# Altium PCB MineSafe.PcbDoc
Units mil, origin at the board's own origin, x right, y up, seen from the top; angles counter-clockwise.
Board outline 3681.36 x 3681.36 mil, 2 copper layers (Top Layer, Bottom Layer); 32 components, 29 nets, 153 pads, 6 vias.
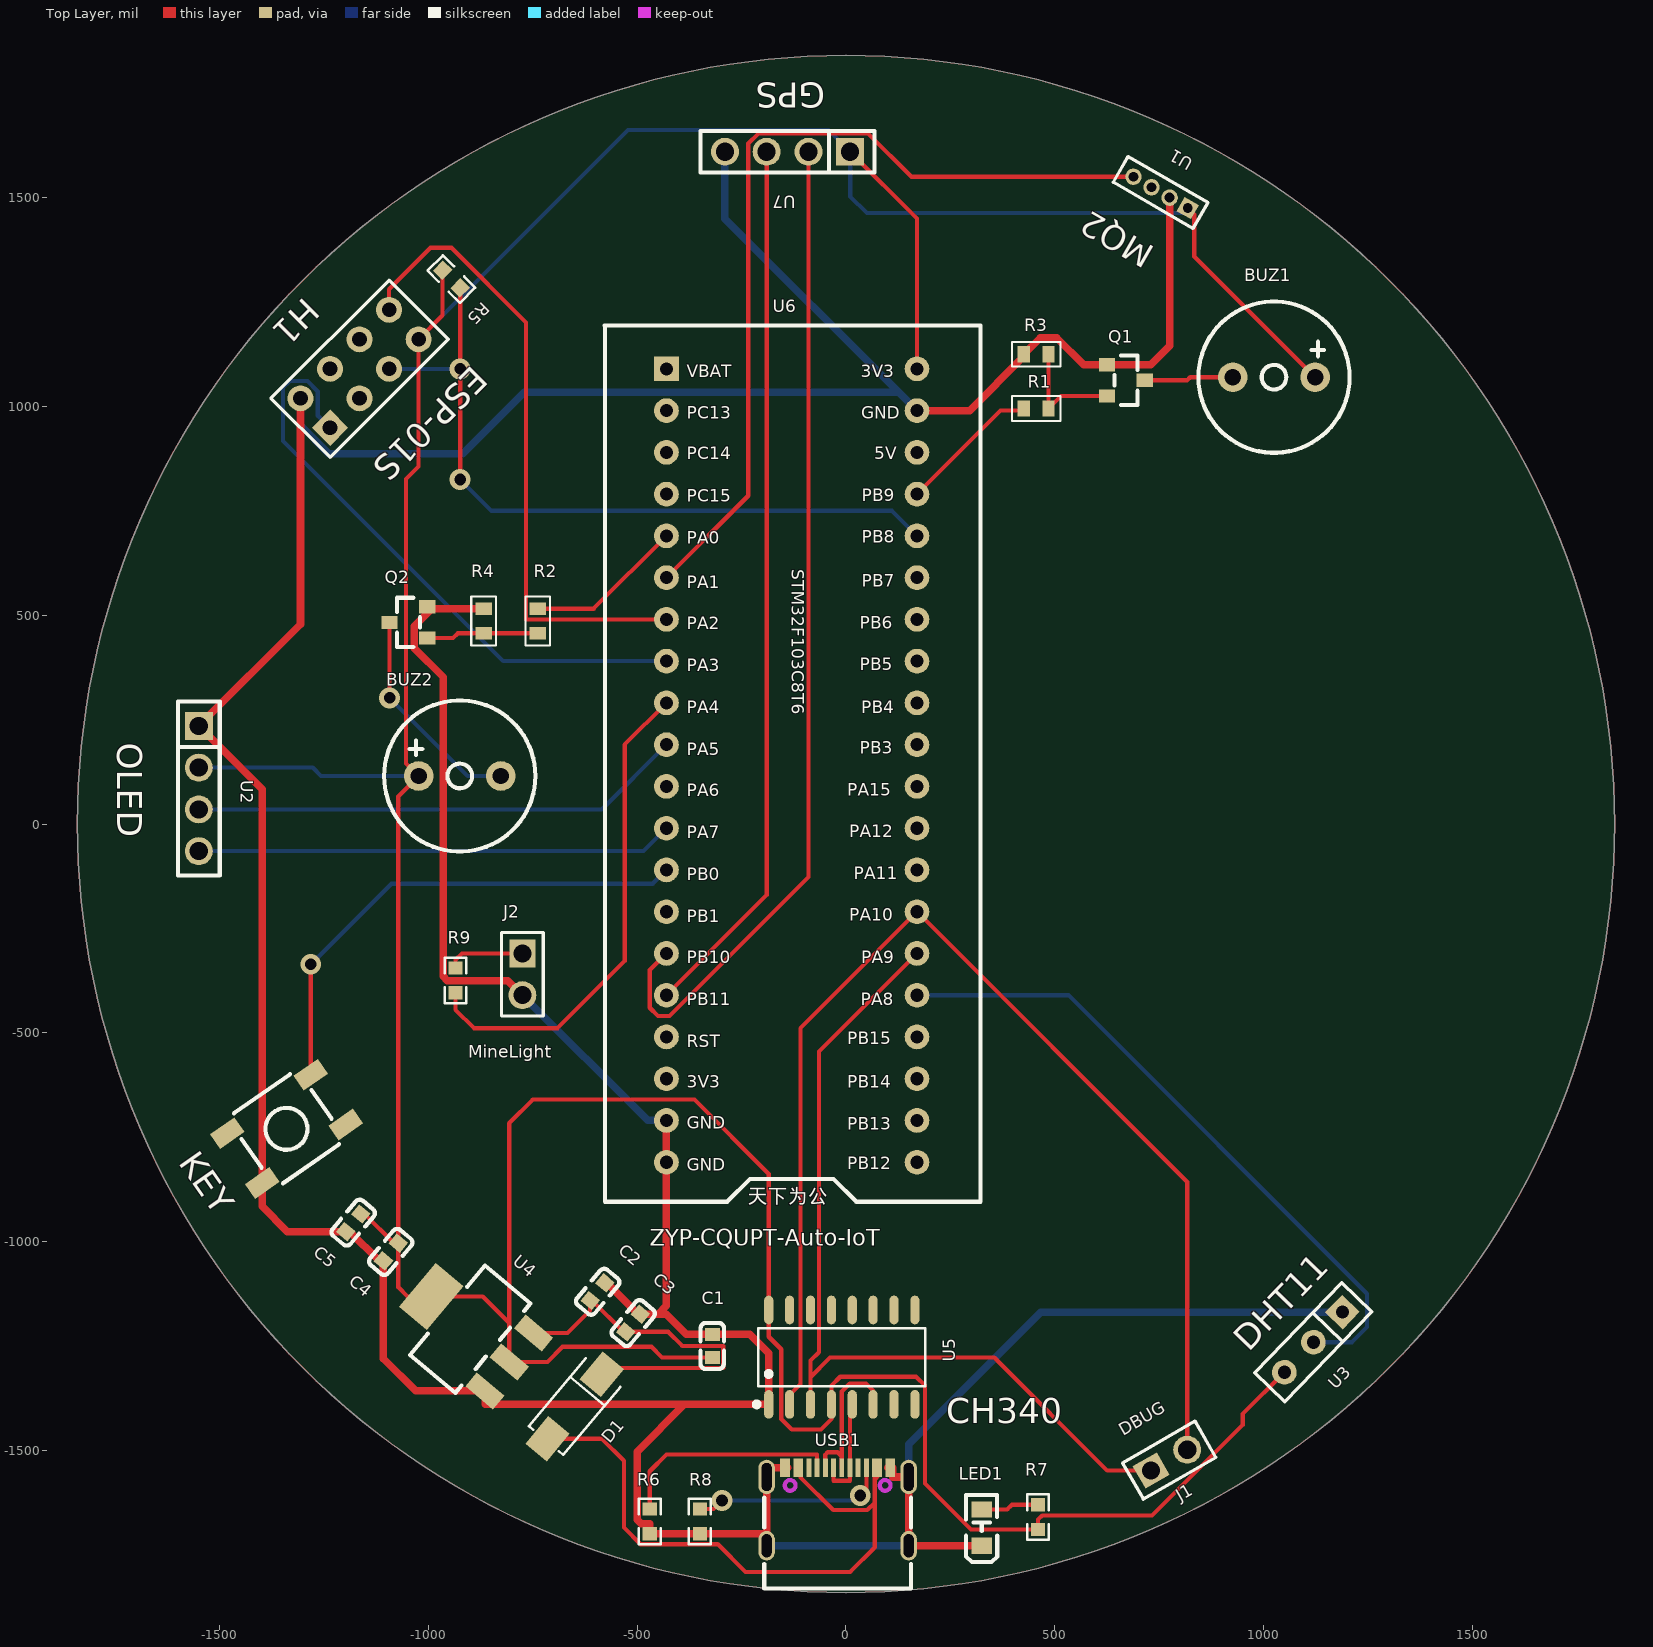
[diagram p0: Top Layer view]
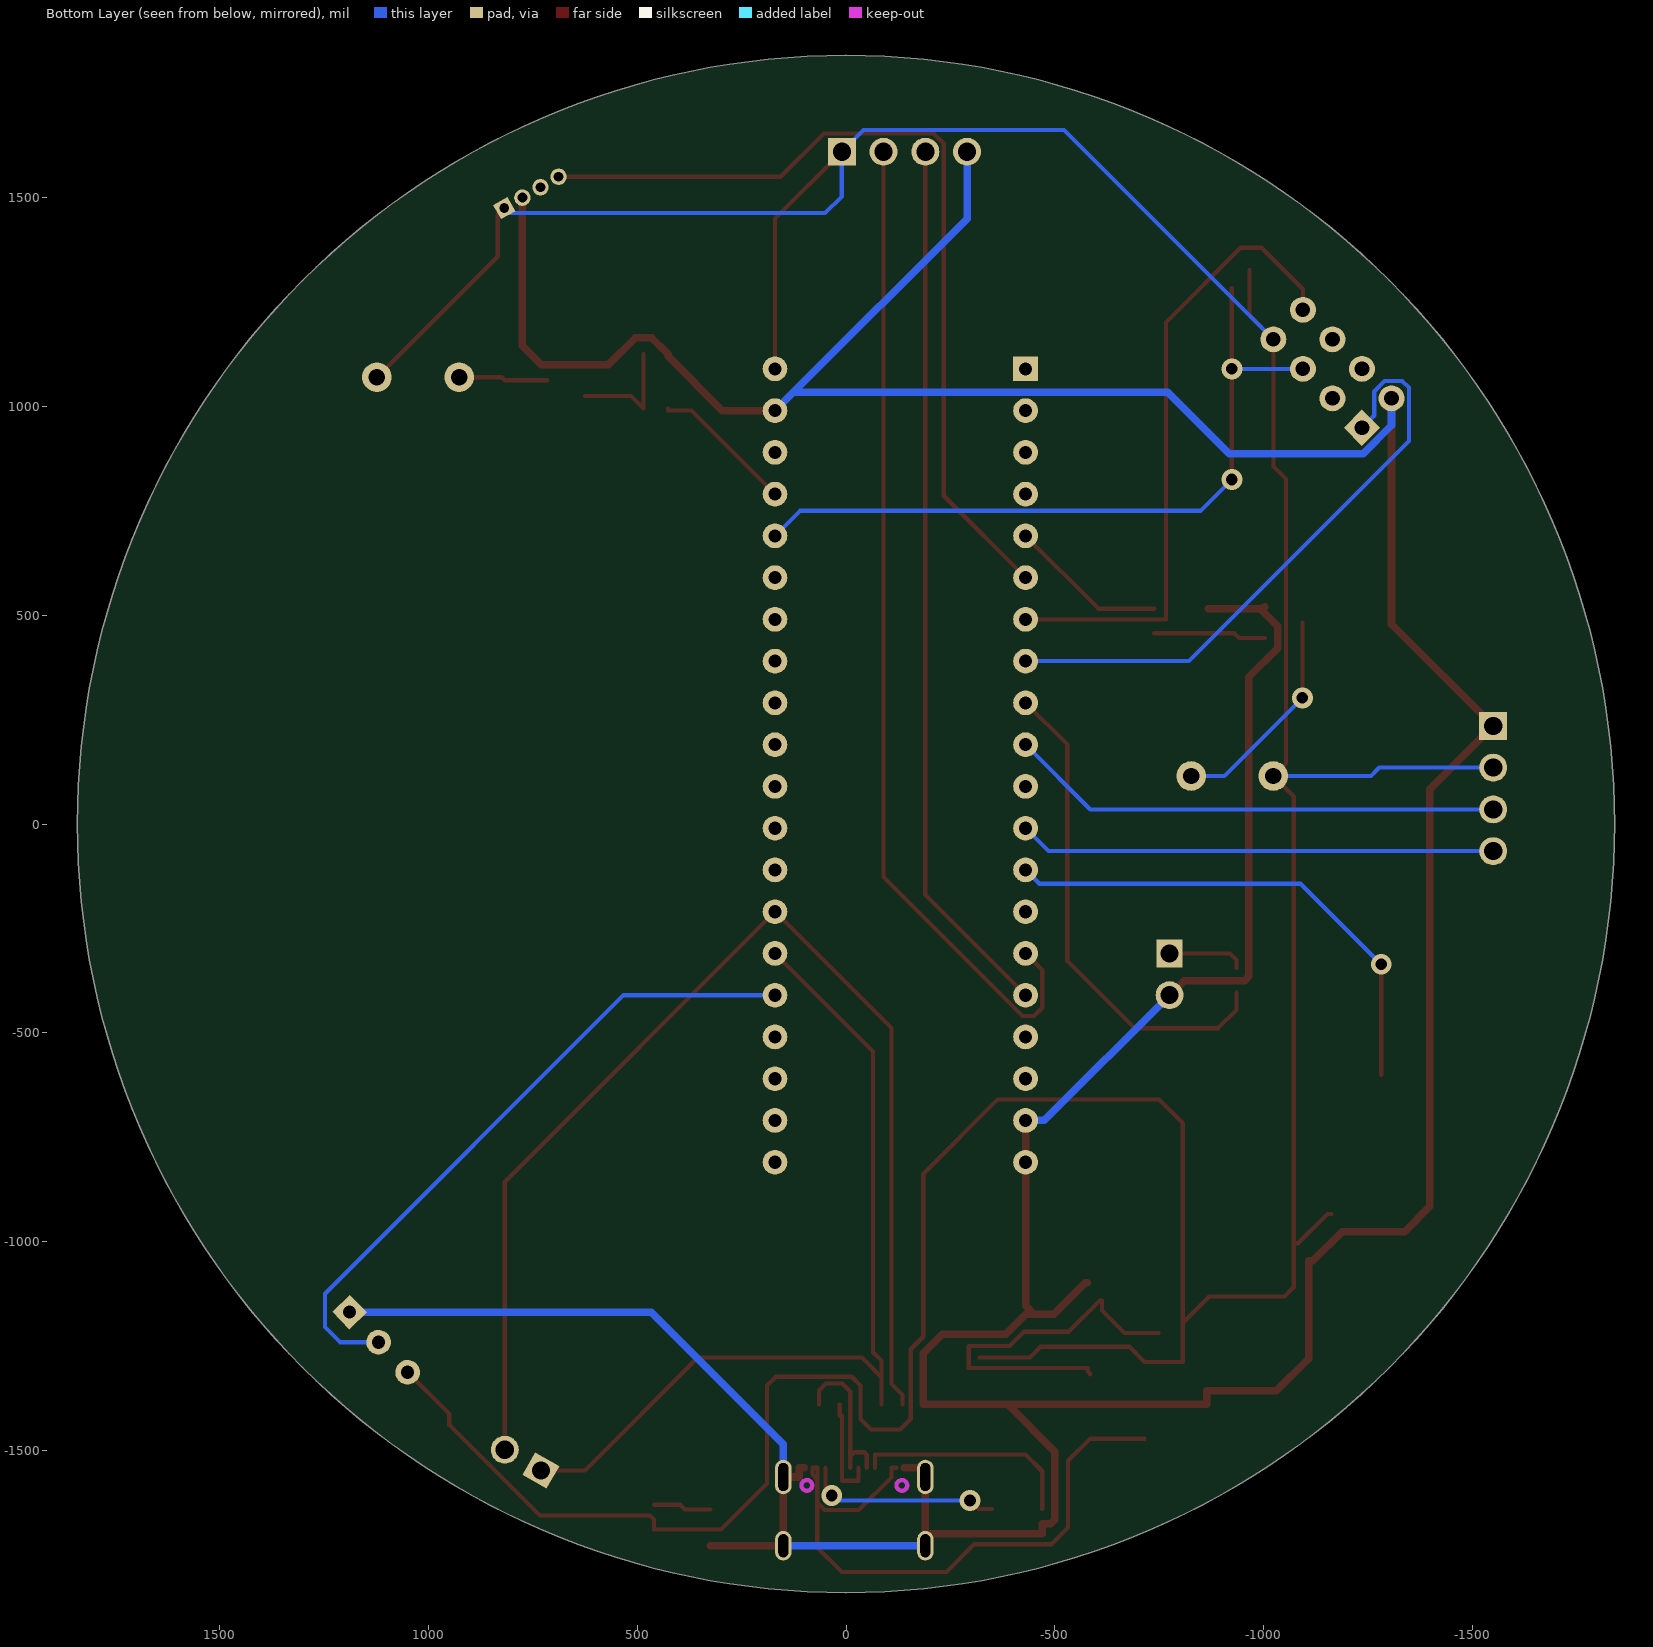
[diagram p1: Bottom Layer view, seen from below]

## Layer stack, top to bottom
Top Solder: solder mask 0.4, Solder Resist, Dk 3.5
Top Layer: signal copper 1.4
Dielectric 1: dielectric 12.6, FR-4, Dk 4.8
Bottom Layer: signal copper 1.4
Bottom Solder: solder mask 0.4, Solder Resist, Dk 3.5

## Board outline
0,-1840.68 cw(c0,0) -1840.68,0 cw(c0,0) 0,1840.68 cw(c0,0) 1840.68,0 cw(c0,0)

## Design rules (kind name [scope] priority, off if disabled: settings)
AssemblyTestPointUsage [All] p0: scope1count=1 scope1_0_kind=Board scope1_0_value=Board scope2count=1 scope2_0_kind=Board scope2_0_value=Board commentlength=0
AssemblyTestpoint [All] p0: scope1count=1 scope1_0_kind=Board scope1_0_value=Board scope2count=1 scope2_0_kind=Board scope2_0_value=Board commentlength=0
Clearance Clearance_ROOM [All] p0 off: scope1count=1 scope1_0_kind=Board scope1_0_value=Board scope2count=1 scope2_0_kind=Board scope2_0_value=Board commentlength=69 gap=0 // Protel DXP Scope 1 Expression Was: WithinRoom('RoomDefinition_2')
Clearance [All] p0: scope1count=1 scope1_0_kind=Board scope1_0_value=Board scope2count=1 scope2_0_kind=Board scope2_0_value=Board commentlength=0 gap=5
Clearance Clearance_ROOM [WithinRoom('RoomDefinition_2')] p1: gap=0 ignorepadtopadclearanceinfootprint=FALSE
Clearance [All] p2: gap=5 ignorepadtopadclearanceinfootprint=FALSE except(3: Arc-SMDPad Track-SMDPad; 10: Arc-Poly Track-Poly SMDPad-Poly THPad-Poly Via-Poly Fill-Poly Poly-Poly)
ComponentClearance [All] p0: scope1count=1 scope1_0_kind=Board scope1_0_value=Board scope2count=1 scope2_0_kind=Board scope2_0_value=Board commentlength=0 gap=10 collisioncheckmode=3
DiffPairsRouting [All] p0: scope1count=1 scope1_0_kind=Board scope1_0_value=Board scope2count=1 scope2_0_kind=Board scope2_0_value=Board commentlength=0
FabricationTestPointUsage [All] p0: scope1count=1 scope1_0_kind=Board scope1_0_value=Board scope2count=1 scope2_0_kind=Board scope2_0_value=Board commentlength=0 valid=0 allowmultiple=FALSE
FabricationTestpoint [All] p0: scope1count=1 scope1_0_kind=Board scope1_0_value=Board scope2count=1 scope2_0_kind=Board scope2_0_value=Board commentlength=0 side=3 testpointundercomponent=TRUE minsize=40 maxsize=100 preferedsize=60 minholesize=0 maxholesize=40 preferedholesize=32 testpointgrid=1
FanoutControl Fanout_BGA [All] p0 off: scope1count=1 scope1_0_kind=Board scope1_0_value=Board scope2count=1 scope2_0_kind=Board scope2_0_value=Board commentlength=69 // Protel DXP Scope 1 Expression Was: IsBGA   Fanout_BGA (Default Rule)
FanoutControl Fanout_LCC [All] p0 off: scope1count=1 scope1_0_kind=Board scope1_0_value=Board scope2count=1 scope2_0_kind=Board scope2_0_value=Board commentlength=69 // Protel DXP Scope 1 Expression Was: IsLCC   Fanout_LCC (Default Rule)
FanoutControl Fanout_SOIC [All] p0 off: scope1count=1 scope1_0_kind=Board scope1_0_value=Board scope2count=1 scope2_0_kind=Board scope2_0_value=Board commentlength=71 // Protel DXP Scope 1 Expression Was: IsSOIC   Fanout_SOIC (Default Rule)
FanoutControl Fanout_Small [All] p0 off: scope1count=1 scope1_0_kind=Board scope1_0_value=Board scope2count=1 scope2_0_kind=Board scope2_0_value=Board commentlength=84 // Protel DXP Scope 1 Expression Was: (CompPinCount < 5)   Fanout_Small (Default Rule)
FanoutControl Fanout_Default [All] p0: scope1count=1 scope1_0_kind=Board scope1_0_value=Board scope2count=1 scope2_0_kind=Board scope2_0_value=Board commentlength=30 // Fanout_Default (Default Rule)
Height [All] p0: scope1count=1 scope1_0_kind=Board scope1_0_value=Board scope2count=1 scope2_0_kind=Board scope2_0_value=Board commentlength=0
HoleSize [All] p0: scope1count=1 scope1_0_kind=Board scope1_0_value=Board scope2count=1 scope2_0_kind=Board scope2_0_value=Board commentlength=0 absolutevalues=TRUE maxlimit=128 minlimit=1 maxpercent=80.000 minpercent=20.000
HoleSize [All] p1: absolutevalues=TRUE maxlimit=128 minlimit=1 maxpercent=80.000 minpercent=20.000
HoleToHoleClearance [All] p0: scope1count=1 scope1_0_kind=Board scope1_0_value=Board scope2count=1 scope2_0_kind=Board scope2_0_value=Board commentlength=0
LayerPairs [All] p0: scope1count=1 scope1_0_kind=Board scope1_0_value=Board scope2count=1 scope2_0_kind=Board scope2_0_value=Board commentlength=0 enforce=TRUE
MinimumSolderMaskSliver [All] p0: scope1count=1 scope1_0_kind=Board scope1_0_value=Board scope2count=1 scope2_0_kind=Board scope2_0_value=Board commentlength=0
MinimumSolderMaskSliver [All] p1: minsoldermaskwidth=3
NetAntennae [All] p0: scope1count=1 scope1_0_kind=Board scope1_0_value=Board scope2count=1 scope2_0_kind=Board scope2_0_value=Board commentlength=0
PasteMaskExpansion [All] p0: scope1count=1 scope1_0_kind=Board scope1_0_value=Board scope2count=1 scope2_0_kind=Board scope2_0_value=Board commentlength=0 expansion=0
PlaneClearance [All] p0: scope1count=1 scope1_0_kind=Board scope1_0_value=Board scope2count=1 scope2_0_kind=Board scope2_0_value=Board commentlength=0 clearance=20
PlaneConnect [All] p0: scope1count=1 scope1_0_kind=Board scope1_0_value=Board scope2count=1 scope2_0_kind=Board scope2_0_value=Board commentlength=0 planeconnectstyle=Relief reliefexpansion=20 reliefentries=4 reliefconductorwidth=10 reliefairgap=10
PolygonConnect [All] p0: scope1count=1 scope1_0_kind=Board scope1_0_value=Board scope2count=1 scope2_0_kind=Board scope2_0_value=Board commentlength=0 connectstyle=Relief reliefconductorwidth=10 reliefentries=4 polygonreliefangle="90 Angle"
PolygonConnect [All] p1: thpad.connectstyle=Relief thpad.reliefconductorwidth=10 thpad.reliefentries=4 thpad.polygonreliefangle="90 Angle" thpad.airgapwidth=10 smdpad.connectstyle=Relief smdpad.reliefconductorwidth=10 smdpad.reliefentries=4 smdpad.polygonreliefangle="90 Angle" smdpad.airgapwidth=10 via.connectstyle=Direct via.reliefconductorwidth=10 via.reliefentries=4 via.polygonreliefangle="90 Angle" via.airgapwidth=10
RoutingCorners [All] p0: scope1count=1 scope1_0_kind=Board scope1_0_value=Board scope2count=1 scope2_0_kind=Board scope2_0_value=Board commentlength=0 cornerstyle=45-Degree minsetback=100 maxsetback=100
RoutingLayers [All] p0: scope1count=1 scope1_0_kind=Board scope1_0_value=Board scope2count=1 scope2_0_kind=Board scope2_0_value=Board commentlength=0 top layer=Automatic bottom layer=Automatic
RoutingPriority [All] p0: scope1count=1 scope1_0_kind=Board scope1_0_value=Board scope2count=1 scope2_0_kind=Board scope2_0_value=Board commentlength=0
RoutingTopology [All] p0: scope1count=1 scope1_0_kind=Board scope1_0_value=Board scope2count=1 scope2_0_kind=Board scope2_0_value=Board commentlength=0 topology=Shortest
RoutingVias [All] p0: scope1count=1 scope1_0_kind=Board scope1_0_value=Board scope2count=1 scope2_0_kind=Board scope2_0_value=Board commentlength=0 holewidth=28 width=50 viastyle="Through Hole" minholewidth=28 minwidth=50 maxholewidth=28 maxwidth=50
RoutingVias [All] p1: holewidth=28 width=50 viastyle="Through Hole" minholewidth=28 minwidth=50 maxholewidth=28 maxwidth=50
ShortCircuit [All] p0: scope1count=1 scope1_0_kind=Board scope1_0_value=Board scope2count=1 scope2_0_kind=Board scope2_0_value=Board commentlength=0 allowed=FALSE
SilkToBoardRegionClearance [All] p0: scope1count=1 scope1_0_kind=Board scope1_0_value=Board scope2count=1 scope2_0_kind=Board scope2_0_value=Board commentlength=0
SilkToSilkClearance [All] p0: scope1count=1 scope1_0_kind=Board scope1_0_value=Board scope2count=1 scope2_0_kind=Board scope2_0_value=Board commentlength=0
SilkToSolderMaskClearance [All] p0 off: scope1count=1 scope1_0_kind=Board scope1_0_value=Board scope2count=1 scope2_0_kind=Board scope2_0_value=Board commentlength=44 // Protel DXP Scope 1 Expression Was: IsPad
SilkToSolderMaskClearance [IsPad] p1: minsilkscreentomaskgap=3 clearancetoexposedcopper=TRUE
SolderMaskExpansion [All] p0: scope1count=1 scope1_0_kind=Board scope1_0_value=Board scope2count=1 scope2_0_kind=Board scope2_0_value=Board commentlength=0 expansion=3
SolderMaskExpansion [All] p1: expansion=3 istentingtop=FALSE
SupplyNets "Schematic Supply Nets_2" [All] p0: scope1count=1 scope1_0_kind=Net scope1_0_value=VUSB scope2count=1 scope2_0_kind=Board scope2_0_value=Board commentlength=0 voltage=0.000
SupplyNets "Schematic Supply Nets_1" [All] p0: scope1count=1 scope1_0_kind=Net scope1_0_value=VCC scope2count=1 scope2_0_kind=Board scope2_0_value=Board commentlength=0 voltage=0.000
SupplyNets "Schematic Supply Nets" [All] p0: scope1count=1 scope1_0_kind=Net scope1_0_value=GND scope2count=1 scope2_0_kind=Board scope2_0_value=Board commentlength=0 voltage=0.000
SupplyNets "Schematic Supply Nets_2" [InNet('VUSB')] p1: voltage=0.000
SupplyNets "Schematic Supply Nets_1" [InNet('VCC')] p2: voltage=0.000
SupplyNets "Schematic Supply Nets" [InNet('GND')] p3: voltage=0.000
UnRoutedNet [All] p0: scope1count=1 scope1_0_kind=Board scope1_0_value=Board scope2count=1 scope2_0_kind=Board scope2_0_value=Board commentlength=0
UnpouredPolygon [All] p0: scope1count=1 scope1_0_kind=Board scope1_0_value=Board scope2count=1 scope2_0_kind=Board scope2_0_value=Board commentlength=0
Width GND [All] p0: scope1count=1 scope1_0_kind=Net scope1_0_value=GND scope2count=1 scope2_0_kind=Board scope2_0_value=Board commentlength=0 maxlimit=18 minlimit=15 preferedwidth=18
Width VCC [All] p0: scope1count=1 scope1_0_kind=NetClass scope1_0_value=VCC scope2count=1 scope2_0_kind=Board scope2_0_value=Board commentlength=0 maxlimit=13 minlimit=12 preferedwidth=13
Width [All] p0: scope1count=1 scope1_0_kind=Board scope1_0_value=Board scope2count=1 scope2_0_kind=Board scope2_0_value=Board commentlength=0 maxlimit=20 minlimit=10 preferedwidth=10
Width GND [InNet('GND')] p1: maxlimit=18 minlimit=15 preferedwidth=18 minimp=50.000000 maximp=50.000000 favimp=50.000000
Width VCC [InNetClass('VCC')] p2: maxlimit=13 minlimit=12 preferedwidth=13 minimp=50.000000 maximp=50.000000 favimp=50.000000
Width [All] p3: maxlimit=20 minlimit=10 preferedwidth=10
27 further rules are at their usual default settings.

## Components (designator, comment, footprint, x,y, rotation, side; value= is the part's Value field where it differs from the comment)
BUZ1 "HNB09A03 3.3V" BUZ-TH_BD9.0-P5.00-D0.6-FD 1025,1070 r180 top
BUZ2 "HNB09A03 3.3V" BUZ-TH_BD9.0-P5.00-D0.6-FD -925,115 r0 top
C1 "100nF" C0603 -320,-1250 r90 top
C2 "10uF" C0603 -595,-1120 r230 top
C3 "100nF" C0603 -510,-1195 r230 top
C4 "10uF" C0603 -1090,-1025 r50 top
C5 "100nF" C0603 -1180,-955 r50 top
D1 "SS14" SMA_L4.2-W2.6-LS5.3-RD -650,-1395 r230 top
H1 "ESP-01S" HDR-F-2.54_2X4 -1165,1090 r45 top
J1 "Debugging port" HDR-M-2.54_1X2 773.86,-1523.53 r30 top
J2 "BIGLED" HDR-M-2.54_1X2 -775,-360 r270 top
KEY "TS-1187A-C-D-B" KEY-SMD_4P-L5.2-W5.2-P3.7-LS6.4-TL -1340,-730 r35 top
LED1 "FC-2012HRK-620D" LED0805-RD_RED 325,-1685 r90 top
Q1 "" S8050_SOT-23#1 670.28,1057.6 r180 top
Q2 "" S8050_SOT-23#2 -1048.02,477.87 r0 top
R1 "1K" R0603_SMD-CRCW060327R0FKEA 455.47,995 r180 top
R2 "1K" R0603_SMD-CRCW060327R0FKEA -738.02,486.16 r90 top
R3 "10K" R0603_SMD-CRCW060327R0FKEA 455.47,1125 r180 top
R4 "10K" R0603_SMD-CRCW060327R0FKEA -868.02,486.16 r90 top
R5 "10kΩ" R0603 -945,1305 r135 top
R6 "5.1kΩ" R0603 -470,-1670 r270 top
R7 "510Ω" R0603 460,-1660 r270 top
R8 "5.1kΩ" R0603 -350,-1670 r90 top
R9 "510Ω" R0603 -935,-374.66 r90 top
U1 "MQ2" MHDR1X4 818.3,1475 r150 top
U2 "" HDR-TH_4P-P2.54-V-F -1550,85 r270 top
U3 "DHT11-Module" HDR-F-2.54_1X3 1115.67,-1237.5 r226 top
U4 "AMS1117-3.3" SOT-223-3_L6.5-W3.4-P2.30-LS7.0-BR -900,-1210 r320 top
U5 "CH340C" SOP-16_L10.0-W3.9-P1.27-LS6.0-BL -10,-1276.91 r0 top
U6 "MCU_MHDR" STM32F103C8T6-BLUEPILL -130,90 r0 top
U7 "NEO-6M" HDR-TH_4P-P2.54-V-F -140,1610 r180 top
USB1 "TYPEC-304A-ACP16L" USB-C-SMD_XUNPU_TYPEC-304A-ACP16L -20,-1635 r0 top

## Footprints (in the part's own frame and the unit in brackets; to place one, negate y for a bottom-side part, rotate by r counter-clockwise, add the part's x,y. Pads: shape width x height; smd on the part's side, far side on the other; paste and mask are expansions set on the pad)
BUZ-TH_BD9.0-P5.00-D0.6-FD [mm]
  round 1.8 hole 1 copper offset 0,0: 1(-2.5,0)
  round 1.8 hole 1: 2(2.5,0)
  silkscreen extent -4.6,-4.6 4.6,4.6
C0603 [mm]
  rect 0.8x0.9 smd paste+0 mask+0: 1(-0.7,0) 2(0.7,0)
  silkscreen extent -1.4,-0.7 1.4,0.72
HDR-F-2.54_1X3 [mm]
  rect 1.5x1.5 hole 0.8: 1(-2.54,0.127)
  round 1.5 hole 0.8: 2(0,0.127) 3(2.54,0.127)
  silkscreen extent -3.81,-1.14 3.81,1.4
HDR-F-2.54_2X4 [mil]
  rect 62x62 hole 35 paste+0 mask+0: 1(-150,-50)
  round 62 hole 35 paste+0 mask+0: 2(-150,50) 3(-50,-50) 4(-50,50) 5(50,-50) 6(50,50) 7(150,-50) 8(150,50)
  silkscreen extent -200,-100 200,100
HDR-M-2.54_1X2 [mm]
  rect 1.7x1.575 hole 1.1 paste+0 mask+0: 1(-1.27,0)
  round 1.7 hole 1.1 paste+0 mask+0: 2(1.27,0)
  silkscreen extent -2.54,-1.27 2.54,1.27
HDR-TH_4P-P2.54-V-F [mm]
  rect 1.7x1.7 hole 1.1: 1(-3.81,0)
  round 1.7 hole 1.1: 2(-1.27,0) 3(1.27,0) 4(3.81,0)
  silkscreen extent -5.29,-1.27 5.29,1.27
KEY-SMD_4P-L5.2-W5.2-P3.7-LS6.4-TL [mm]
  rect 1.8x1.1 smd paste+0 mask+0: 1(-3.1,1.85) 2(3.1,1.85) 3(-3.1,-1.85) 4(3.1,-1.85)
  silkscreen extent -2.6,-2.6 2.6,2.6
LED0805-RD_RED [mm]
  rect 1x1.25 smd paste+0 mask+0: 1(-1.1,0) 2(1.1,0)
  silkscreen extent -2.1,-0.95 1.98,0.96
MHDR1X4 [mm] "Connector; Header; 4 Position"
  rect 1x1 hole 0.6: 1(0,0)
  round 1 hole 0.6: 2(1.27,0) 3(2.54,0) 4(3.81,0)
  silkscreen extent -0.9,-0.9 4.71,0.9
R0603 [mil]
  rect 31.75x34.02 smd paste-3937.01 mask+0: 1(-29.66,0) 2(29.66,0)
  silkscreen extent -55,-26 55,26
R0603_SMD-CRCW060327R0FKEA [mm]
  rect 0.75x1 smd: 1(-0.75,0) 2(0.75,0)
  silkscreen extent -1.48,-0.75 1.48,0.75
S8050_SOT-23#1 [mm]
  rect 1x0.8 smd paste+0 mask+0: 1(1.15,0.823) 2(1.15,-1.077) 3(-1.15,-0.127)
  silkscreen extent -0.7,-1.63 0.7,1.37
S8050_SOT-23#2 [mm]
  rect 1x0.8 smd paste+0 mask+0: 1(1.15,-0.823) 2(1.15,1.077) 3(-1.15,0.127)
  silkscreen extent -0.7,-1.37 0.7,1.63
SMA_L4.2-W2.6-LS5.3-RD [mm]
  rect 2.2x1.7 smd paste+0 mask+0: 1(-2.565,0) 2(2.565,0)
  silkscreen extent -2.7,-1.36 2.7,1.36
SOP-16_L10.0-W3.9-P1.27-LS6.0-BL [mm]
  oval 0.56x1.745 smd paste+0 mask+0: 1(-4.445,-2.872) 2(-3.175,-2.872) 3(-1.905,-2.872) 4(-0.635,-2.872) 5(0.635,-2.872) 6(1.905,-2.872) 7(3.175,-2.872) 8(4.445,-2.872) 9(4.445,2.872) 10(3.175,2.872) 11(1.905,2.872) 12(0.635,2.872) 13(-0.635,2.872) 14(-1.905,2.872) 15(-3.175,2.872) 16(-4.445,2.872)
  silkscreen extent -5.33,-3.02 5.08,1.77
SOT-223-3_L6.5-W3.4-P2.30-LS7.0-BR [mm]
  rect 2.2x1.1 smd paste+0 mask+0: 1(3.099,-2.3) 2(3.099,0) 3(3.099,2.3)
  rect 2.2x3.5 smd paste+0 mask+0: 4(-3.099,0)
  silkscreen extent -1.8,-3.55 1.8,3.55
STM32F103C8T6-BLUEPILL [mm]
  rect 1.5x1.5 hole 0.8 paste+0 mask+0: 1(-7.62,25.4)
  round 1.5 hole 0.8 paste+0 mask+0: 2(-7.62,22.86) 3(-7.62,20.32) 4(-7.62,17.78) 5(-7.62,15.24) 6(-7.62,12.7) 7(-7.62,10.16) 8(-7.62,7.62) 9(-7.62,5.08) 10(-7.62,2.54) 11(-7.62,0) 12(-7.62,-2.54) 13(-7.62,-5.08) 14(-7.62,-7.62) 15(-7.62,-10.16) 16(-7.62,-12.7) 17(-7.62,-15.24) 18(-7.62,-17.78) 19(-7.62,-20.32) 20(-7.62,-22.86) 21(7.62,-22.86) 22(7.62,-20.32) 23(7.62,-17.78) 24(7.62,-15.24) 25(7.62,-12.7) 26(7.62,-10.16) 27(7.62,-7.62) 28(7.62,-5.08) 29(7.62,-2.54) 30(7.62,0) 31(7.62,2.54) 32(7.62,5.08) 33(7.62,7.62) 34(7.62,10.16) 35(7.62,12.7) 36(7.62,15.24) 37(7.62,17.78) 38(7.62,20.32) 39(7.62,22.86) 40(7.62,25.4)
  silkscreen extent -11.38,-25.26 11.48,28.03
USB-C-SMD_XUNPU_TYPEC-304A-ACP16L [mm]
  oval 1x2.1 hole 0.6 slot 1.7 at 90 deg paste+0 mask+0: 25(4.32,1.807) 28(-4.32,1.807)
  oval 1x1.8 hole 0.6 slot 1.4 at 90 deg paste+0 mask+0: 26(4.32,-2.373) 27(-4.32,-2.373)
  rect 0.3x1.15 smd paste-100 mask+0: A1(-3.35,2.373) A4(-2.55,2.373) A5(-1.25,2.373) A6(-0.25,2.373) A7(0.25,2.373) A8(1.25,2.373) A9(2.55,2.373) A12(3.35,2.373) B1(3.05,2.373) B4(2.25,2.373) B5(1.75,2.373) B6(0.75,2.373) B7(-0.75,2.373) B8(-1.75,2.373) B9(-2.25,2.373) B12(-3.05,2.373)
  Keep-Out Layer circle w0.254: c2.89,1.295 r0.325
  Keep-Out Layer circle w0.005: c2.89,1.295 r0.325
  Keep-Out Layer circle w0.254: c-2.89,1.295 r0.325
  Keep-Out Layer circle w0.005: c-2.89,1.295 r0.325
  silkscreen extent -4.47,-4.97 4.47,0.54

## Part data
J1 J2: library part HDR-M-2.54_1x2
Q1 Q2: library part S8050_SOT_NPN
U2: library part 0.96OLED
U6: library part STM32F103C8T6-Bluepill
U7: library part ATK-NEO-6M

## Via types
v1: diameter 50, hole 28, Top Layer to Bottom Layer, 6 vias

## Nets (pads, with @x,y where several pads share a name; then routed paths per layer and width w, separated by ;. In a path a pad name is that pad's centre, name@x,y a point inside that pad or via, vN(x,y) a via of type N, cw(c..) or ccw(c..) an arc to the next point about the centre after c; other vN are vias at no path point)
+5V: C2.2 C3.2 D1.1 U4.3 | length 900.4
  Top Layer w10: U4.3 -666.77,-1219.05 -612.72,-1165 C2.2 -608,-1141.11 -533,-1216.11 C3.2 -425.89,-1216.11 -392,-1250 -294,-1250 -294,-1303 -578.75,-1303 -578.75,-1310.09 D1.1
CC1: R6.1 USB1.A5 | length 539.3
  Top Layer w10: R6.1 -470,-1550 -430,-1510 -69.21,-1510 USB1.A5
CC2: R8.2 USB1.B5 | length 470
  Top Layer w10: R8.2 -317.34,-1640.34 v1(-297,-1620) ; v1(34,-1608) 48.9,-1593.1 USB1.B5
  Bottom Layer w10: v1(-297,-1620) 22,-1620 v1(34,-1608)
GND: C1.2 C2.1 C3.1 C4.1 C5.1 H1.2 J2.2 KEY.3 LED1.1 Q1.2 Q2.2 R3.2 R4.2 R6.2 R8.1 U1.2 U2.1 U3.1 U4.1 U5.1 U6.19 U6.20 U6.39 U7.4 USB1.25 USB1.26 USB1.27 USB1.28 USB1.A1 USB1.A12 USB1.B1 USB1.B12 | length 12837.8
  Top Layer w18: H1.2 -1306.42,478.58 U2.1 -1398.2,83.2 KEY.3 -1398.2,-915.8 -1337.89,-976.11 C5.1 -1188,-976.11 -1118,-1046.11 C4.1 -1107.71,-1280.07 -1030,-1357.79 U4.1 -864,-1357.79 -864,-1390 -387,-1390 ; Q2.2 Q2.2@-991.96,515.69 ; R4.2 -933.41,515.69 Q2.2@-991.96,515.69 ; J2.2 -810,-375 -955,-375 -965,-365 -965,352 -1034.43,421.43 -1034.43,473.22 Q2.2@-991.96,515.69 ; C2.1 -573,-1098.89 -498,-1173.89 C3.1 -450,-1173.89 ; U6.19 U6.20 -430,-1153.89 -450,-1173.89 ; USB1.27 USB1.27@-190.08,-1699.66 ; USB1.B12 USB1.A1 -151.89,-1542 -190.08,-1542 USB1.28 USB1.27@-190.08,-1699.66 ; USB1.B1 USB1.A12 111.89,-1563.84 USB1.25 USB1.26 237,-1728.41 237.1,-1728.31 LED1.1 ; U6.39 295.95,990 425.95,1120 R3.2 465.78,1164.84 504.16,1164.84 569,1100 Q1.2 730,1100 775,1145 U1.2 ; -450,-1173.89 -431,-1173.89 -382.45,-1222.44 C1.2 -230,-1222.44 -185,-1267.44 U5.1 -387,-1390 ; -387,-1390 -500,-1503 -500,-1666 -490,-1676 -470,-1676 R6.2 R8.1 USB1.27@-190.08,-1699.66
  Bottom Layer w18: H1.2 -1306.42,955 -1238.42,887 -918,887 -771,1034 126,1034 ; J2.2 -475,-710 U6.19 ; U7.4 -290,1450 126,1034 ; USB1.27 -190.08,-1729 150.08,-1729 USB1.26 ; USB1.25 150.08,-1485 466.04,-1169.04 U3.1 ; U6.39 126,1034
NetBUZ1_2: BUZ1.2 Q1.3 | length 214.1
  Top Layer w10: Q1.3 817,1062.6 824.4,1070 BUZ1.2
NetBUZ2_2: BUZ2.2 Q2.3 | length 525
  Top Layer w10: Q2.3 -1093,482.87 v1(-1093,302)
  Bottom Layer w10: v1(-1093,302) -906,115 BUZ2.2
NetJ2_1: J2.1 R9.2 | length 186.2
  Top Layer w10: R9.2 -935,-325 -920,-310 J2.1
NetLED1_2: LED1.2 R7.1 | length 139.7
  Top Layer w10: LED1.2 386,-1641.69 397.35,-1630.34 R7.1
NetQ1_1: Q1.1 R1.1 R3.1 | length 282.5
  Top Layer w10: R3.1 R1.1 515.2,1025.2 Q1.1
NetQ2_1: Q2.1 R2.1 R4.1 | length 269.3
  Top Layer w10: Q2.1 -941,445.47 -929.84,456.63 R4.1 R2.1
PA0: R2.2 U6.5 | length 380.2
  Top Layer w10: R2.2 -604.31,515.69 U6.5
PA1: U1.4 U6.6 | length 2096.6
  Top Layer w10: U6.6 -234,786 -234,1630 -210,1654 53,1654 157,1550 U1.4
PA2: H1.8 U6.7 | length 1539.8
  Top Layer w10: H1.8 -1094.29,1280.71 -995,1380 -945,1380 -766,1201 -766,490 U6.7
PA3: H1.1 U6.8 | length 1463.8
  Bottom Layer w10: H1.1 -1265,977.87 -1265,1036 -1290,1061 -1332,1061 -1348,1045 -1348,917 -821,390 U6.8
PA4: R9.1 U6.9 | length 1190
  Top Layer w10: R9.1 -935,-445 -891,-489 -691,-489 -530,-328 -530,190 U6.9
PA5: U2.3 U6.10 | length 1184.2
  Bottom Layer w10: U2.3 -585,35 U6.10
PA7: U2.4 U6.12 | length 1142.8
  Bottom Layer w10: U2.4 -485,-65 U6.12
PA8: U3.2 U6.25 | length 1597.8
  Bottom Layer w10: U6.25 533,-410 1248,-1125 1248,-1205 1212.03,-1240.97 U3.2
PA9: J1.1 U5.3 U6.26 | length 2132.7
  Top Layer w10: U5.3 -85,-1325 ; U6.26 -65,-545 -65,-1265 -85,-1285 -85,-1325 ; J1.1 625.53,-1548.53 355,-1278 -38,-1278 -85,-1325
PA10: J1.2 U5.2 U6.27 | length 2862.9
  Top Layer w10: U5.2 -135,-1367 -109,-1341 -109,-489 U6.27 817.16,-857.16 J1.2
PB0: KEY.2 U6.13 | length 1209.7
  Top Layer w10: KEY.2 v1(-1281.8,-336)
  Bottom Layer w10: v1(-1281.8,-336) -1088.8,-143 -463,-143 U6.13
PB8: H1.5 R5.1 U6.36 | length 1779.2
  Top Layer w10: v1(-924.03,825) v1(-924.03,1090) R5.1
  Bottom Layer w10: H1.5 v1(-924.03,1090) ; v1(-924.03,825) -849.03,750 110,750 U6.36
PB9: R1.2 U6.37 | length 343.8
  Top Layer w10: U6.37 370,990 425.95,990 R1.2
PB10: U6.15 U7.2 | length 2409.8
  Top Layer w10: U6.15 -470,-350 -470,-440 -450,-460 -423,-460 -90,-127 U7.2
PB11: U6.16 U7.3 | length 2119.4
  Top Layer w10: U6.16 -190,-170 U7.3
USB_D+: U5.5 USB1.A6 USB1.B6 | length 259.3
  Top Layer w10: USB1.A6 -29.84,-1573 9.53,-1573 USB1.B6 9.53,-1417.35 15,-1417.35 U5.5
USB_D-: U5.6 USB1.A7 USB1.B7 | length 382.9
  Top Layer w10: USB1.B7 -49.53,-1510.39 -43.67,-1504.53 -20.63,-1504.53 -10.16,-1515 ; USB1.A7 -10.16,-1515 ; U5.6 65,-1357 48,-1340 9,-1340 -10.16,-1359.16 -10.16,-1515
VCC: BUZ1.1 BUZ2.1 C1.1 C4.2 C5.2 H1.7 R5.2 R7.2 U1.1 U2.2 U3.3 U4.2 U4.4 U5.4 U5.16 U6.40 U7.1 | length 10967
  Top Layer w10: C5.2 -1153,-933.89 -1083,-1003.89 C4.2 ; R5.2 -965.97,1218.32 H1.7 -1023.58,856 -1053.43,826.15 -1053.43,144.99 BUZ2.1 -1072.28,66.15 C4.2 ; C1.1 -440.44,-1277.56 -466,-1252 -678.58,-1252 -715,-1288.42 U4.2 -806.54,-1195.04 ; U7.1 170,1450 U6.40 ; U1.1 834,1459.3 834,1359.44 BUZ1.1 ; U3.3 950,-1412.71 950,-1439 733,-1656 470,-1656 460,-1666 R7.2 299.32,-1689.66 188.86,-1579.2 188.86,-1345 167.71,-1323.86 -13.86,-1323.86 -35,-1345 U5.4 -35,-1425 -60,-1450 -130,-1450 -155,-1425 -155,-1258 -185,-1228 U5.16 -185,-838 -363,-660 -750,-660 -806.54,-716.54 -806.54,-1195.04 ; C4.2 -1072.28,-1109.3 -1050,-1131.58 U4.4 -870,-1131.58 -806.54,-1195.04
  Bottom Layer w10: U2.2 -1277,135 -1257,115 BUZ2.1 ; H1.7 -522.29,1662 -42,1662 U7.1 10,1503 50,1463 806.3,1463 U1.1
VUSB: D1.2 USB1.A4 USB1.A9 USB1.B4 USB1.B9 | length 1525.4
  Top Layer w10: D1.2 -584.63,-1472.37 -532,-1525 -532,-1685 -492,-1725 -307,-1725 -241,-1791 10,-1791 69,-1732 69,-1625 ; USB1.A4 USB1.B9 -108.58,-1565 -30.58,-1643 51,-1643 69,-1625 ; 69,-1625 69,-1573.42 ; 69,-1573.42 69,-1569.39 80.39,-1558 USB1.A9 USB1.B4 69,-1573.42
pads on no net: H1.3 H1.4 H1.6 KEY.1 KEY.4 U1.3 U5.7 U5.8 U5.9 U5.10 U5.11 U5.12 U5.13 U5.14 U5.15 U6.1 U6.2 U6.3 U6.4 U6.11 U6.14 U6.17 U6.18 U6.21 U6.22 U6.23 U6.24 U6.28 U6.29 U6.30 U6.31 U6.32 U6.33 U6.34 U6.35 U6.38 USB1.A8 USB1.B8

## Polygon pours and split planes (outlines as drawn)
GND on Top Layer "GND_L01_P000" (solid, remove dead copper, pour order 0): 0,-1840.68 cw(c0,0) -1840.68,0 cw(c0,0) 0,1840.68 cw(c0,0) 1840.68,0 cw(c0,0)
GND on Bottom Layer "GND_L02_P001" (solid, remove dead copper, pour order 1): 0,-1840.68 cw(c0,0) -1840.68,0 cw(c0,0) 0,1840.68 cw(c0,0) 1840.68,0 cw(c0,0)

## Silkscreen, mask and mechanical layers (free items; w line width, h text height)
Top Overlay:
  text "GPS" at -50,1775 h60 r180
  text "MQ2" at 752.53,1395.72 h100 r150
  text "ESP-01S" at -895,1100.86 h60 r225
  text "OLED" at -1745,195 h60 r270
  text "MineLight" at -905,-560 h30
  text "天下为公" at -234.96,-919.75 h60
  text "ZYP-CQUPT-Auto-IoT" at -470,-1010 h39
  text "DHT11" at 964.75,-1265.86 h60 r46
  text "CH340" at 240,-1435 h60
  text "DBUG" at 663.66,-1466.34 h30 r30
Mechanical 1:
  circle w10: c0,0 r1840.68

## Text inside footprints (layer, text, board x,y; h text height)
R9: Bottom Layer "OLED" at -3312.96,-1029.39 h30
U6: Top Overlay "VBAT" at -381,1070 h30; Top Overlay "PC13" at -381,971 h30; Top Overlay "PC14" at -381,873 h30; Top Overlay "PC15" at -381,772 h30; Top Overlay "PA0" at -381,671 h30; Top Overlay "PA1" at -381,565 h30; Top Overlay "PA2" at -381,467 h30; Top Overlay "PA3" at -381,366 h30; Top Overlay "PA4" at -381,265 h30; Top Overlay "PA5" at -381,165 h30; Top Overlay "PA6" at -381,67 h30; Top Overlay "PA7" at -381,-34 h30; Top Overlay "PB0" at -381,-135 h30; Top Overlay "PB1" at -381,-235 h30; Top Overlay "PB10" at -381,-333 h30; Top Overlay "PB11" at -381,-434 h30; Top Overlay "RST" at -381,-535 h30; Top Overlay "3V3" at -381,-632 h30; Top Overlay "GND" at -381,-730 h30; Top Overlay "GND" at -381,-831 h30; Top Overlay "3V3" at 35,1070 h30; Top Overlay "GND" at 36.6,971 h30; Top Overlay "5V" at 67.8,873 h30; Top Overlay "PB9" at 38,773 h30; Top Overlay "PB8" at 38,673 h30; Top Overlay "PB7" at 38,568 h30; Top Overlay "PB6" at 33,468 h30; Top Overlay "PB5" at 33,368 h30; Top Overlay "PB4" at 36.6,265 h30; Top Overlay "PB3" at 33,168 h30; Top Overlay "PA15" at 3,68 h30; Top Overlay "PA12" at 8,-32 h30; Top Overlay "PA11" at 18,-132 h30; Top Overlay "PA10" at 8,-232 h30; Top Overlay "PA9" at 36.6,-333 h30; Top Overlay "PA8" at 35,-434 h30; Top Overlay "PB15" at 3,-527 h30; Top Overlay "PB14" at 3,-632 h30; Top Overlay "PB13" at 3,-732 h30; Top Overlay "PB12" at 3,-827 h30; Top Overlay "STM32F103C8T6" at -130,610 h30 r270